# Altium PCB 02交通灯Z.PcbDoc
Units mil, origin at the board's own origin, x right, y up, seen from the top; angles counter-clockwise.
Board outline 437.53 x 1529.42 mil, 2 copper layers (Top Layer, Bottom Layer); 3 components, 8 nets, 22 pads, 12 vias.
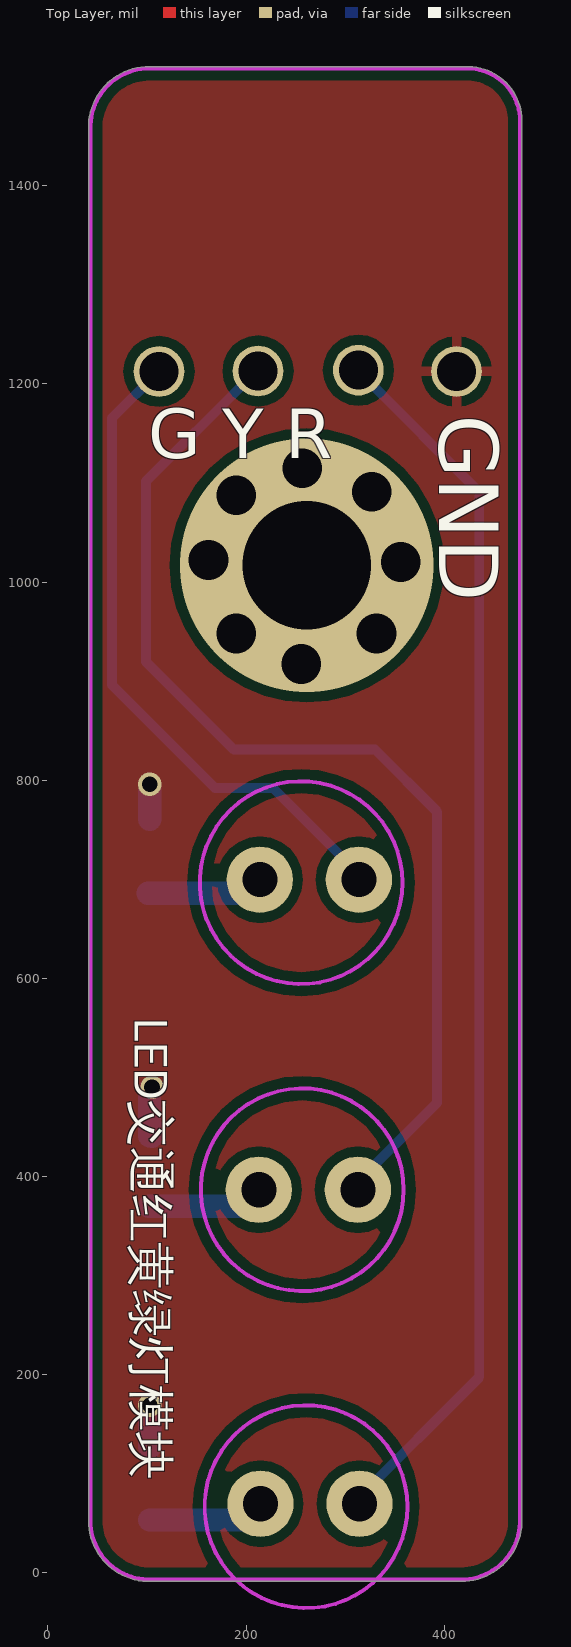
[diagram p0: Top Layer view]
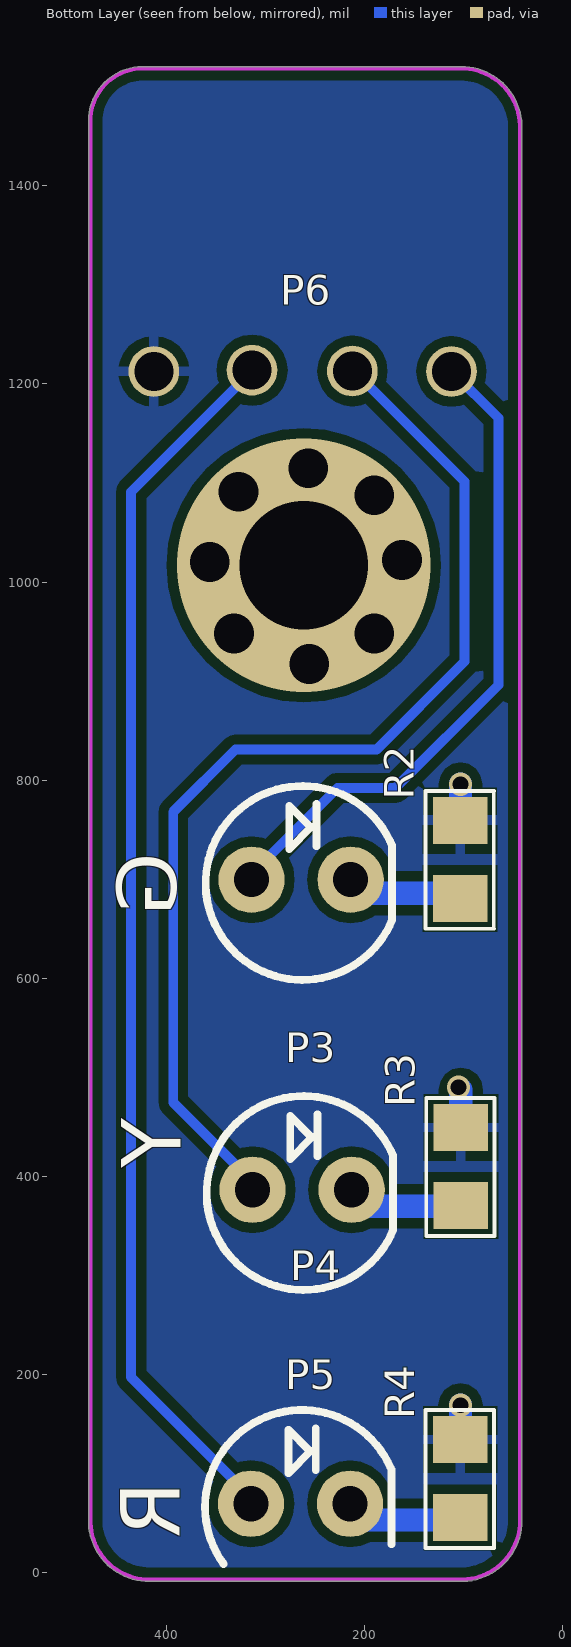
[diagram p1: Bottom Layer view, seen from below]
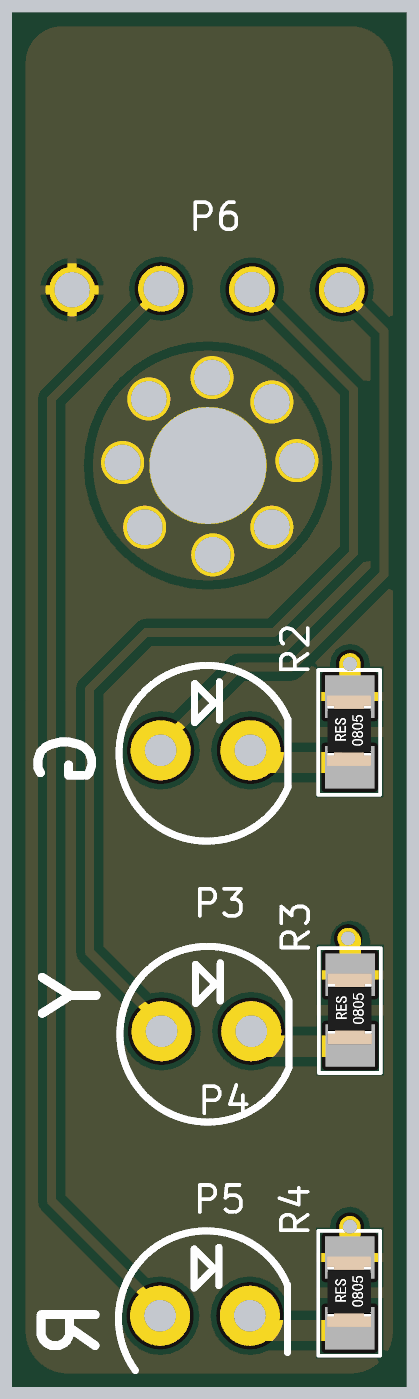
[diagram p2: 3D render of the assembled board from below, using the file's embedded part models]

## Layer stack, top to bottom
Top Solder: solder mask 0.4, Solder Resist, Dk 3.5
Top Layer: signal copper 1.4
Dielectric1: dielectric 12.6, FR-4, Dk 4.8
Bottom Layer: signal copper 1.4
Bottom Solder: solder mask 0.4, Solder Resist, Dk 3.5

## Board outline
331 vertices, not listed, extent 40.97,-8.97 478.49,1520.44

## Design rules (kind name [scope] priority, off if disabled: settings)
Clearance CAM_Clearance_2 [OnLayer('Top Layer')] p1: gap=10 ignorepadtopadclearanceinfootprint=FALSE except(0: Arc-Hole Track-Hole SMDPad-Hole THPad-Hole Via-Hole Fill-Hole Poly-Hole Region-Hole Text-Hole)
Clearance CAM_Clearance_1 [OnLayer('Bottom Layer')] p2: gap=10 ignorepadtopadclearanceinfootprint=FALSE except(0: Arc-Hole Track-Hole SMDPad-Hole THPad-Hole Via-Hole Fill-Hole Poly-Hole Region-Hole Text-Hole)
Clearance [All] p3: gap=10 ignorepadtopadclearanceinfootprint=FALSE except(0: Arc-Hole Track-Hole SMDPad-Hole THPad-Hole Via-Hole Fill-Hole Poly-Hole Region-Hole Text-Hole)
PolygonConnect PolygonConnect_1 [isvia] p1: connectstyle=Direct reliefconductorwidth=10 reliefentries=4 polygonreliefangle="90 Angle" airgapwidth=10
PolygonConnect [All] p2: connectstyle=Relief reliefconductorwidth=10 reliefentries=4 polygonreliefangle="90 Angle" airgapwidth=10
RoutingVias [All] p1: holewidth=28 width=50 viastyle="Through Hole" minholewidth=28 minwidth=50 maxholewidth=28 maxwidth=50
SilkToSolderMaskClearance SilkscreenOverComponentPads [IsPad] p1: minsilkscreentomaskgap=10 clearancetoexposedcopper=TRUE
SolderMaskExpansion [All] p1: expansion=4
Width CAM_Width_2 [OnLayer('Top Layer')] p1: maxlimit=11 minlimit=4 preferedwidth=5
Width CAM_Width_1 [OnLayer('Bottom Layer')] p2: maxlimit=24.62 minlimit=6.87 preferedwidth=7.87
Width [All] p3: maxlimit=10 minlimit=10 preferedwidth=10
29 further rules are at their usual default settings.

## Components (designator, comment, footprint, x,y, rotation, side; value= is the part's Value field where it differs from the comment)
R2 "220R 5%" 0805-R 103.37,720 r90 bottom
R3 "220R 5%" 0805-R 102.54,410 r90 bottom
R4 "220R 5%" 0805-R 103.24,95 r90 bottom

## Footprints (in the part's own frame and the unit in brackets; to place one, negate y for a bottom-side part, rotate by r counter-clockwise, add the part's x,y. Pads: shape width x height; smd on the part's side, far side on the other; paste and mask are expansions set on the pad)
0805-R [mm]
  rect 1.2x1.4 smd: 1(-1,0) 2(1,0)
  silkscreen extent -1.78,-0.86 1.75,0.89, body extent -0.97,-0.61 1.03,0.64, height 0.55

## Free pads (board coordinates)
  round 66.93 hole 35.43: 0(212.9,386.51) 0(213.9,699.54) 0(214.48,69.51) 0(312.9,386.51) 0(313.9,699.54) 0(314.48,69.51)
  rect 39.37x26 smd far side: 1(102.11,369.7)
  rect 39.37x26 smd far side paste+0 mask+4: 1(102.54,441.17) 1(102.81,54.11) 1(102.95,685.53) 1(103.24,125.58) 1(103.37,757)
  round 51.18 hole 39.37: 1(112.13,1212.62) 1(212.13,1213.04) 1(313.38,1213.87) 1(412.54,1212.63)

## Via types
v1: diameter 40, hole 40, Top Layer to Bottom Layer, 8 vias
v2: diameter 23.62, hole 15.75, Top Layer to Bottom Layer, 3 vias
v3: diameter 255.91, hole 129.92, Top Layer to Bottom Layer, 1 vias

## Nets (pads, with @x,y where several pads share a name; then routed paths per layer and width w, separated by ;. In a path a pad name is that pad's centre, name@x,y a point inside that pad or via, vN(x,y) a via of type N, cw(c..) or ccw(c..) an arc to the next point about the centre after c; other vN are vias at no path point)
$Net0: pad.1@102.54,441.17 pad.1@103.24,125.58 pad.1@103.37,757 pad.1@412.54,1212.63 R2.2 R3.2 R4.2 | length 133.1
  Bottom Layer w23.62: R3.2@102.54,441.17 v2@102.54,487.54 ; R4.2@102.96,126.36 v2(102.96,168.86) ; R2.2@102.96,760.54 v2(102.95,795.93) ; R3.2@104.63,440.54 R3.2@104.63,449.37
  other v2: 105,490
$Net1: pad.0@214.48,69.51 pad.1@102.81,54.11 R4.1 | length 118.3
  Bottom Layer w23.62: R4.1@102.96,53.05 198.02,53.05 pad.0@214.48,69.51
$Net2: pad.0@314.48,69.51 pad.1@313.38,1213.87 | length 1240.8
  Bottom Layer w7.87: pad.1@320.05,1206.35 pad.1@320.05,1212.2
  Bottom Layer w10: pad.0@309.62,71.36 435.46,197.19 435.46,1090.94 pad.1@320.05,1206.35
$Net3: pad.0@312.9,386.51 pad.1@212.13,1213.04 | length 1103.3
  Bottom Layer w7.87: pad.1@201.29,1203.86 pad.1@201.29,1208.86
  Bottom Layer w10: pad.1@201.29,1203.86 98.8,1101.37 98.8,919.68 187.53,830.95 330.05,830.95 392.96,768.04 392.96,474.69 pad.0@307.12,388.86
$Net4: pad.0@212.9,386.51 pad.1@102.11,369.7 R3.1 | length 117.7
  Bottom Layer w23.62: R3.1@102.13,369.7 196.09,369.7 pad.0@212.9,386.51
$Net5: pad.0@213.9,699.54 pad.1@102.95,685.53 R2.1 | length 116
  Bottom Layer w23.62: R2.1@101.31,685.96 192.56,685.96 pad.0@210.05,703.45
$Net6: pad.0@313.9,699.54 pad.1@112.13,1212.62 | length 660.3
  Bottom Layer w10: pad.1@111.29,1213.86 111.29,1212.19 64.76,1165.66 64.76,896.22 168.78,792.2 227.12,792.2 310.37,708.94 pad.0@310.37,708.78
$Net7: 
  other v1: 255.82,917.27 189.98,948.09 331.64,948.09 356.23,1020.18 162.07,1022.27 189.98,1087.68 327.07,1091.02 256.64,1114.78
  other v3: 261.22,1016.84

## Polygon pours and split planes (outlines as drawn)
$Net0 on Top Layer "Top Layer-No Net" (solid, pour order 1002): 331 vertices, not listed, extent 40.97,-8.97 478.49,1520.44
$Net0 on Bottom Layer "Top Layer-No Net1" (solid, pour order 1003): 331 vertices, not listed, extent 40.97,-8.97 478.49,1520.44

## Keep-outs
Top Layer:
  circle w4: c255.52,696.51 r102.36
  circle w4: c256.74,386.51 r102.36
  circle w4: c260.52,66.51 r102.36
Keep-Out Layer:
  lines w3.94: 42.95,52.08 42.95,1459.39 42.99,1461.47 43.3,1465.59 43.88,1469.69 44.76,1473.73 45.91,1477.7 47.34,1481.58 49.04,1485.36 50.99,1489 53.19,1492.5 55.64,1495.84 58.31,1499 61.19,1501.97 64.27,1504.72 67.54,1507.26 70.98,1509.56 74.57,1511.62 78.29,1513.42 82.13,1514.95 86.07,1516.22 90.08,1517.21 94.16,1517.91 98.28,1518.33 102.41,1518.46 ; 42.96,52.47 43.09,48.34 43.51,44.22 44.21,40.14 45.2,36.13 46.47,32.19 48,28.35 49.8,24.63 51.86,21.04 54.16,17.6 56.7,14.33 59.45,11.25 62.42,8.36 65.58,5.7 68.92,3.25 72.42,1.05 76.06,-0.9 79.84,-2.6 83.72,-4.03 87.69,-5.18 91.73,-6.05 95.83,-6.64 99.95,-6.95 102.03,-6.99 ; 102.05,-6.97 418.28,-6.97 ; 102.1,1518.44 423.56,1518.44 ; 417.05,-6.99 421.18,-6.86 425.3,-6.44 429.38,-5.74 433.39,-4.75 437.33,-3.48 441.17,-1.95 444.89,-0.15 448.48,1.91 451.92,4.21 455.19,6.75 458.27,9.5 461.15,12.47 463.82,15.63 466.27,18.97 468.47,22.47 470.42,26.11 472.12,29.89 473.55,33.77 474.7,37.74 475.57,41.78 476.16,45.88 476.47,50 476.51,52.08 476.51,1465.51 ; 423.03,1518.44 424.88,1518.43 428.57,1518.21 432.23,1517.73 435.85,1517 439.41,1516.01 442.9,1514.78 446.29,1513.32 449.57,1511.61 452.72,1509.69 455.73,1507.55 458.58,1505.2 461.27,1502.66 463.77,1499.94 466.07,1497.05 468.17,1494.01 470.05,1490.83 471.7,1487.52 473.12,1484.11 474.29,1480.61 475.22,1477.03 475.9,1473.4 476.32,1469.73 476.49,1466.04

## Silkscreen, mask and mechanical layers (free items; w line width, h text height)
Top Overlay:
  text "GND" at 395,1168.65 h60 r270
  text "G Y R" at 101.31,1125 h50
  text "LED交通红黄绿灯模块" at 76.06,560 h60 r270
Bottom Overlay:
  drawing of 222 lines, arcs and shapes, not listed
  text "P6" at 285,1280 h30
  text "G" at 390.15,726.88 h60 r270
  text "P3" at 280,515 h30
  text "Y" at 385.28,458.79 h60 r270
  text "P4" at 275,295 h30
  text "P5" at 280,185 h30
  text "R" at 386.46,91.51 h60 r270